# Altium PCB PAY_IFP_V1.PcbDoc (part 4 of 5)
Units mil, origin at the board's own origin, x right, y up, seen from the top; angles counter-clockwise.
Board outline 3661.42 x 3543.31 mil, 6 copper layers (L1 TOP, L2 GND 1, L3 SIGNAL, L4 PWR, L5 GND 2, L6 BOT), stack 59.685 mil thick; 511 components, 371 nets, 2264 pads, 383 vias.
Unrouted connection lines stored in the file: 1001.
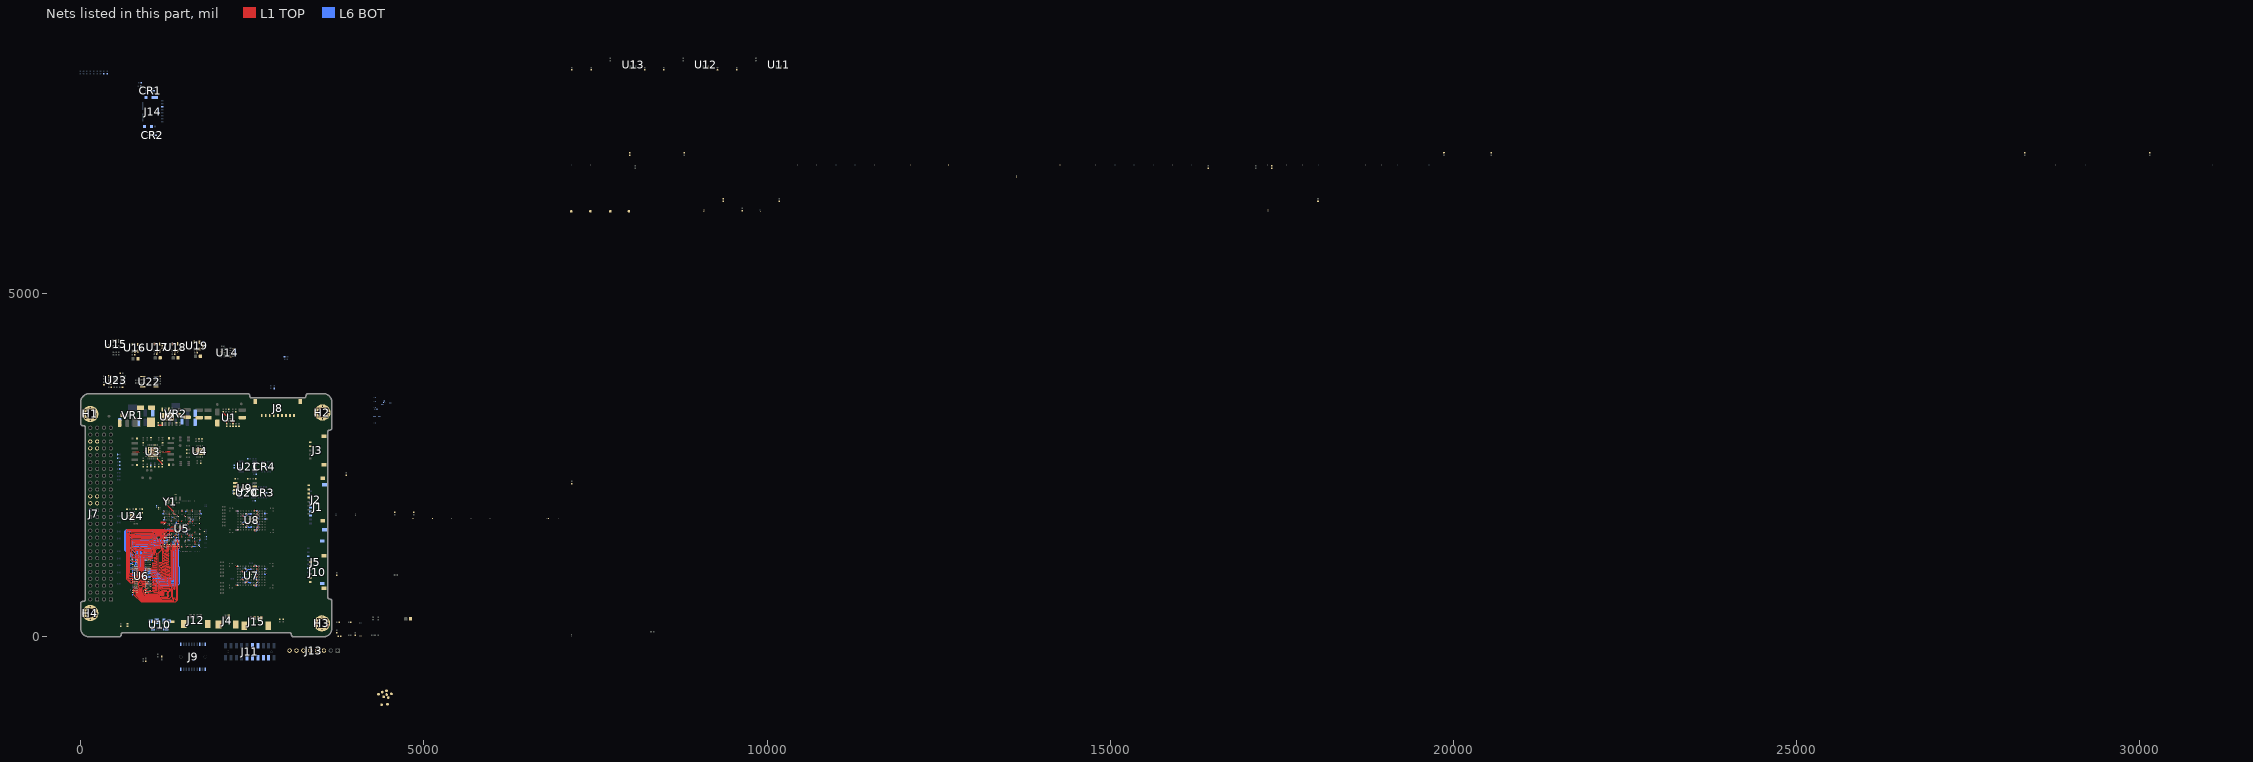
[diagram p3: the nets of this part, all layers, seen from the top]

## Via types
v1: diameter 13.78, hole 5.91, L1 TOP to L6 BOT, 276 vias
v2: diameter 13.78, hole 7.87, L1 TOP to L6 BOT, 71 vias
v3: diameter 15.75, hole 7.87, L1 TOP to L6 BOT, 25 vias
v4: diameter 15.75, hole 7.87, L1 TOP to L6 BOT, tented both sides, 9 vias
v5: diameter 13.78, hole 7.87, L1 TOP to L6 BOT, tented both sides, 2 vias

## Nets (pads, with @x,y where several pads share a name; then routed paths per layer and width w, separated by ;. In a path a pad name is that pad's centre, name@x,y a point inside that pad or via, vN(x,y) a via of type N, cw(c..) or ccw(c..) an arc to the next point about the centre after c; other vN are vias at no path point) (continued)
DDR_A10: U5.T3 U6.L7 | length 1338.9
  L1 TOP w4.92: v1(806.76,976.78) U6.L7@822.5,961.03 ; v1(1258.53,1434.45) U5.T3@1271.32,1447.25
  L6 BOT w4.92: v1(806.76,976.78) 816.6,976.78 832.35,992.52 848.09,992.52 852.03,996.46 852.03,1008.27 848.1,1012.21 842.19,1012.21 838.25,1016.15 838.25,1027.96 842.19,1031.89 852.03,1031.89 855.97,1035.83 855.97,1047.64 852.03,1051.58 842.19,1051.58 838.25,1055.52 838.25,1067.33 842.19,1071.26 848.09,1071.26 852.03,1075.2 852.03,1087.01 848.1,1090.95 842.19,1090.95 838.25,1094.89 838.25,1106.7 842.19,1110.63 852.03,1110.63 855.97,1114.57 855.97,1126.38 852.03,1130.32 842.19,1130.32 838.25,1134.26 838.25,1146.07 842.19,1150 851.05,1150 855.97,1154.92 855.97,1164.77 851.05,1169.69 848.1,1169.69 842.19,1169.69 838.25,1173.63 838.25,1185.44 842.19,1189.37 852.03,1189.37 855.97,1193.31 855.97,1205.12 852.03,1209.06 842.19,1209.06 838.25,1213 838.25,1224.81 842.19,1228.74 848.09,1228.74 852.03,1232.68 852.03,1244.49 848.1,1248.43 836.28,1248.43 820.54,1264.18 820.54,1279.92 816.6,1283.86 800.85,1283.86 796.91,1287.8 796.91,1299.61 800.85,1303.55 848.09,1303.55 852.03,1307.48 852.03,1319.3 848.09,1323.23 765.42,1323.23 756.56,1332.09 756.56,1396.07 762.46,1401.97 1092.19,1401.97 1101.05,1410.83 1110.89,1410.83 1119.75,1401.97 1145.34,1401.97 1180.77,1437.41 1241.8,1437.41 1243.27,1435.93 1257.05,1435.93 v1(1258.53,1434.45)
DDR_A11: U5.M9 U6.R7 | length 1341
  L1 TOP w3.94: v1(1412.07,1536.81) U5.M9@1424.87,1549.61
  L1 TOP w4.92: v1(745.73,1102.76) 806.76,1102.76 U6.R7@822.5,1087.01
  L6 BOT w4.92: v1(745.73,1102.76) 746.22,1103.25 746.22,1123.92 750.65,1128.35 750.65,1176.58 655.18,1272.05 655.18,1527.96 678.8,1551.58 1166.99,1551.58 1170.93,1547.64 1260.5,1547.64 1269.35,1538.78 1339.24,1538.78 1341.21,1536.81 v1(1412.07,1536.81)
DDR_A12: U5.P5 U6.N7 | length 1340.9
  L1 TOP w4.92: v1(806.76,1008.27) U6.N7@822.5,1024.02 ; v1(1309.71,1486.62) 1310.2,1486.62 1322.01,1498.43 U5.P5@1322.5,1498.43
  L6 BOT w4.92: v1(806.76,1008.27) 791.99,1023.04 791.99,1046.66 800.85,1055.52 800.85,1219.89 714.24,1306.5 714.24,1441.34 722.11,1449.22 895.34,1449.22 899.28,1453.15 899.28,1464.96 895.34,1468.9 812.66,1468.9 808.72,1472.84 808.72,1484.65 812.66,1488.59 1159.12,1488.59 1174.87,1472.84 1257.54,1472.84 1271.32,1486.62 v1(1309.71,1486.62)
DDR_A13: U5.V2 U6.T3 | length 1340
  L1 TOP w3.94: v1(1233.92,1384.26) U5.V2@1245.73,1396.07
  L1 TOP w4.92: U6.T3@948.49,1118.51 948.49,1131.3 951.44,1134.26 v1(964.24,1134.26)
  L6 BOT w4.92: v1(964.24,1134.26) 960.3,1130.32 899.28,1130.32 895.34,1134.26 895.34,1146.07 899.28,1150 966.2,1150 970.14,1153.94 970.14,1165.75 966.2,1169.69 899.28,1169.69 895.34,1173.63 895.34,1185.44 899.28,1189.37 1029.2,1189.37 1033.13,1193.31 1033.13,1205.12 1029.2,1209.06 899.28,1209.06 895.34,1213 895.34,1228.74 899.28,1232.68 930.77,1232.68 934.71,1236.62 934.71,1283.86 942.58,1291.74 997.7,1291.74 1001.64,1295.67 1001.64,1307.48 1005.57,1311.42 1092.19,1311.42 1100.06,1319.29 1135.5,1319.29 1139.43,1323.23 1139.43,1331.11 1135.5,1335.04 1093.17,1335.04 1089.24,1331.11 1009.51,1331.11 1005.57,1335.04 1005.57,1346.85 1009.51,1350.79 1147.31,1350.79 1180.77,1384.26 v1(1233.92,1384.26)
DDR_A14: U5.L9 U6.T7 | length 1340.5
  L1 TOP w4.92: v1(735.89,1164.77) 746.72,1153.94 787.07,1153.94 U6.T7@822.5,1118.51 ; v1(1412.07,1562.4) U5.L9@1424.87,1575.2
  L6 BOT w4.92: v1(735.89,1164.77) 639.43,1261.22 639.43,1535.83 670.93,1567.33 1182.74,1567.33 1190.61,1559.45 1261.48,1559.45 1274.28,1572.25 1283.13,1572.25 1295.93,1559.45 1379.59,1559.45 1388.45,1568.31 1406.16,1568.31 v1(1412.07,1562.4)
DDR_A15: U5.R4 U6.M7 | length 1340
  L1 TOP w4.92: U6.M7@822.5,992.52 v1(838.25,976.78) ; v1(1284.12,1460.04) U5.R4@1296.91,1472.84
  L6 BOT w4.92: v1(838.25,976.78) 852.03,976.78 855.97,972.84 855.97,964.96 852.12,961.12 824.07,961.12 823.98,961.03 795.93,961.03 791.01,965.95 791.01,986.62 796.91,992.52 812.66,992.52 824.47,1004.33 824.47,1240.55 743.76,1321.26 743.76,1409.85 751.64,1417.72 1088.25,1417.72 1092.19,1421.66 1092.19,1433.47 1088.25,1437.41 1052.82,1437.41 1049,1441.22 1049,1453.27 1052.82,1457.09 1100.06,1457.09 1107.94,1449.22 1107.94,1433.47 1123.69,1417.72 1143.37,1417.72 1174.87,1449.22 1273.29,1449.22 v1(1284.12,1460.04)
DDR_BA0: U5.V8 U6.M2 | length 1335.1
  L1 TOP w4.92: v1(964.24,976.78) U6.M2@979.98,992.52 ; v1(1386.48,1383.27) U5.V8@1399.28,1396.07
  L6 BOT w4.92: v1(964.24,976.78) 973.09,976.78 988.84,961.03 1048.88,961.03 1115.81,894.1 1115.81,838.98 1123.69,831.11 1226.05,831.11 1229.98,827.17 1229.98,815.36 1226.05,811.42 1151.24,811.42 1148.02,808.2 1148.02,795.67 1151.96,791.74 1371,791.74 1385.5,806.23 1385.5,1273.18 1382,1276.67 1382,1364.03 1386.48,1368.51 v1(1386.48,1383.27)
DDR_BA1: U5.P4 U6.N8 | length 1339.5
  L1 TOP w4.92: v1(775.26,1008.27) U6.N8@791.01,1024.02 ; v1(1263.45,1524.02) 1263.45,1514.18 1266.4,1511.22 1275.26,1511.22 U5.P4@1296.91,1498.43
  L6 BOT w4.92: v1(775.26,1008.27) 710.3,1008.27 701.44,1017.13 701.44,1062.41 710.3,1071.26 748.69,1071.26 761.48,1084.06 761.48,1189.37 670.93,1279.92 670.93,1520.08 686.68,1535.83 1251.64,1535.83 v1(1263.45,1524.02)
DDR_BA2: U5.R8 U6.M3 | length 1341.2
  L1 TOP w4.92: U6.M3@949.47,991.54 v1(965.22,1007.29) ; U5.R8@1399.28,1472.84 v1(1412.07,1460.04)
  L6 BOT w3.94: 1348.09,1379.69 1348.09,1390.16 1355.42,1397.48 1368.15,1397.48 1368.3,1397.64 1384.11,1397.64
  L6 BOT w4.92: v1(965.22,1007.29) 915.02,1007.29 908.13,1000.4 908.13,979.73 915.02,972.84 938.65,972.84 958.33,992.52 1010.5,992.52 1018.37,984.65 1072.5,984.65 1155.18,901.97 1166.99,901.97 1170.93,898.04 1170.93,886.22 1166.99,882.29 1151.24,882.29 1145.34,876.38 1145.34,868.51 1151.24,862.6 1352.03,862.6 1359.91,870.48 1359.91,1252.37 1352.03,1260.24 1352.03,1361.62 1348.09,1365.55 1348.09,1379.69 ; 1384.11,1397.64 1395.34,1408.86 1395.34,1443.31 v1(1412.07,1460.04)
DDR_CAS: U5.T8 U6.K3 | length 1339.2
  L1 TOP w4.92: v1(932.74,945.28) U6.K3@948.49,929.53 ; U5.T8@1399.28,1447.25 v1(1412.07,1434.45)
  L6 BOT w3.94: 1412.07,1287.8 v1(1412.07,1434.45)
  L6 BOT w4.92: v1(932.74,945.28) 924.87,937.41 915.02,937.41 907.15,945.28 907.15,953.15 915.02,961.03 970.14,961.03 985.89,945.28 1041.01,945.28 1100.06,886.22 1100.06,823.23 1147.31,775.99 1375.65,775.99 1412.07,812.41 1412.07,1287.8
DDR_CK_N: TP14.0 U5.T4 U6.K7 | length 1343.3
  L1 TOP w3.94: U6.K7@822.5,929.53 823.86,929.53 841.17,946.85 v1(842.52,946.85) ; v1(1284.12,1434.45) U5.T4@1296.91,1447.25
  L6 BOT w3.94: v1(842.52,946.85) 844.41,944.96 844.41,939.33 847.52,936.22 859.51,936.22 860.3,935.44 865.81,935.44 869.75,939.37 869.75,1308.44 880.6,1319.29 975.09,1319.29 979.03,1323.23 979.03,1335.04 975.09,1338.98 788.08,1338.98 775.26,1351.8 775.26,1369.46 788.08,1382.29 1145.34,1382.29 1171.91,1408.86 1181.95,1408.86 1182.74,1408.07 1221.27,1408.07 1221.47,1408.27 1245.53,1408.27 1247.11,1409.85 1253.41,1409.85 1268.74,1425.17 1274.84,1425.17 v1(1284.12,1434.45)
DDR_CK_P: TP13.0 U5.U4 U6.J7 | length 1341.6
  L1 TOP w3.94: U6.J7@822.5,898.04 823.86,898.04 841.17,915.35 v1(842.52,915.35) ; v1@1283.13,1408.86 v1(1284.12,1408.86) U5.U4@1296.91,1421.66
  L6 BOT w3.94: v1(842.52,915.35) 844.41,917.23 844.41,922.87 847.52,925.98 850.78,925.98 851.56,925.2 872.28,925.2 881.56,934.48 881.56,1303.55 885.5,1307.48 979.98,1307.48 990.84,1318.34 990.84,1339.94 979.98,1350.79 792.98,1350.79 787.07,1356.7 787.07,1364.57 792.98,1370.48 1150.23,1370.48 1176.81,1397.05 1177.06,1397.05 1177.85,1396.26 1226.16,1396.26 1226.36,1396.46 1226.64,1396.46 1228.21,1398.04 1258.3,1398.04 1273.63,1413.36 1276.95,1413.36 1281.45,1408.86 v1(1284.12,1408.86)
DDR_CKE: U5.V3 U6.K9 | length 1341.1
  L1 TOP w3.94: v1(1259.51,1384.26) U5.V3@1271.32,1396.07
  L1 TOP w4.92: U6.K9@759.51,929.53 771.32,929.53 775.26,925.59 v1(775.26,913.78)
  L6 BOT w3.94: 1184.71,1371.46 1230.34,1371.46 1246.72,1371.46 v1(1259.51,1384.26)
  L6 BOT w4.92: v1(775.26,913.78) 773.29,915.75 773.29,946.26 778.21,951.18 788.06,951.18 791.99,947.25 791.99,902.96 801.83,893.11 841.2,893.11 859.91,874.41 869.75,874.41 874.67,879.33 874.67,898.04 878.61,901.97 891.4,901.97 895.34,898.04 895.34,874.41 899.28,870.48 911.09,870.48 915.02,874.41 915.02,916.74 911.09,920.67 899.28,920.67 894.35,925.59 894.35,1109.65 903.21,1118.51 975.06,1118.51 981.95,1125.4 981.95,1165.75 989.83,1173.63 1041.01,1173.63 1048.88,1181.5 1048.88,1216.93 1041.01,1224.81 958.33,1224.81 950.46,1232.68 950.46,1268.11 958.33,1275.99 1005.57,1275.99 1025.26,1295.67 1097.11,1295.67 1106.95,1305.52 1149.28,1305.52 1155.18,1311.42 1155.18,1341.93 1184.71,1371.46
DDR_CS: U5.V7 U6.L2 | length 1339.3
  L1 TOP w4.92: U6.L2@979.98,961.03 v1(995.73,976.78) ; v1(1360.89,1383.27) U5.V7@1373.69,1396.07
  L6 BOT w4.92: v1(995.73,976.78) 1008.53,976.78 1013.45,971.85 1061.68,971.85 1129.59,903.94 1129.59,852.76 1135.5,846.85 1355.97,846.85 1359.91,842.92 1359.91,831.11 1355.97,827.17 1249.67,827.17 1245.73,823.23 1245.73,812.41 1250.65,807.48 1367.78,807.48 1375.65,815.36 1375.65,1269.1 1367.78,1276.97 1367.78,1363.59 1360.89,1370.48 v1(1360.89,1383.27)
DDR_D0: TP11.0 U5.N2 U6.E3 | length 1605.6
  L1 TOP w3.94: 1186.68,1512.21 1233.92,1512.21 U5.N2@1245.73,1524.02
  L1 TOP w4.92: U6.E3@948.49,772.05 883.53,772.05 864.83,790.75 864.83,842.92 855.97,851.78 855.97,890.02 864.83,898.88 864.83,903.55 866.64,905.36 866.64,997.6 855.97,1008.27 855.97,1134.26 804.79,1185.44 789.04,1185.44 769.35,1205.12 744.75,1229.73 744.75,1400.99 753.61,1409.85 867.78,1409.85 871.72,1413.78 871.72,1425.59 867.78,1429.53 749.67,1429.53 745.73,1433.47 745.73,1445.28 749.67,1449.22 1033.13,1449.22 1037.07,1453.15 1037.07,1484.65 1041.01,1488.59 1068.57,1488.59 1092.19,1512.21 1186.68,1512.21
DDR_D1: U5.M7 U6.F7 | length 1599.3
  L1 TOP w3.94: 1180.12,1556.1 1180.19,1556.17 1187.99,1556.17 1190.61,1553.55 1369.75,1553.55 U5.M7@1373.69,1549.61
  L1 TOP w4.92: U6.F7@822.5,803.55 806.76,819.3 718.17,819.3 686.68,850.79 686.68,1508.27 690.61,1512.21 714.24,1512.21 718.17,1516.15 718.17,1527.96 714.24,1531.89 690.61,1531.89 686.68,1535.83 686.68,1547.64 690.61,1551.58 1042.84,1551.58 1047.36,1556.1 1180.12,1556.1
DDR_D2: U5.R3 U6.F2 | length 1594.4
  L1 TOP w3.94: 1189.63,1485.63 1249.67,1485.63
  L1 TOP w4.92: U6.F2@979.98,803.55 964.24,787.8 895.34,787.8 874.67,808.47 874.67,854.73 871.72,857.68 871.72,874.41 874.67,877.37 874.67,899.48 876.48,901.29 876.48,1007.45 871.72,1012.21 871.72,1142.13 800.85,1213 800.85,1236.62 792.98,1244.49 773.29,1244.49 766.47,1251.31 766.47,1391.22 769.35,1394.1 1001.64,1394.1 1005.57,1398.04 1005.57,1409.85 1001.64,1413.78 887.46,1413.78 883.53,1417.72 883.53,1429.53 887.46,1433.47 1037.07,1433.47 1052.82,1449.22 1052.82,1468.9 1056.76,1472.84 1076.44,1472.84 1104,1500.4 1166.99,1500.4 1181.76,1485.63 1189.63,1485.63 ; 1249.67,1485.63 1258.53,1485.63 U5.R3@1271.32,1472.84
DDR_D3: U5.M8 U6.F8 | length 1601.5
  L1 TOP w3.94: 1195.13,1562.9 1195.62,1562.41 1377.59,1562.41 1379.13,1560.87 1388.02,1560.87
  L1 TOP w4.92: U6.F8@791.01,803.55 775.26,787.8 726.05,787.8 670.93,842.92 670.93,1555.52 681.36,1565.94 1191.44,1565.94 1194.49,1562.9 1195.13,1562.9 ; 1388.02,1560.87 U5.M8@1399.28,1549.61
DDR_D4: U5.T2 U6.H3 | length 1601.8
  L1 TOP w4.92: 932.74,1170.67 1033.13,1170.67 1037.07,1166.74 1037.07,1155.91 1033.13,1151.97 932.74,1151.97 928.8,1148.04 928.8,969.89 916.99,958.07 916.99,871.46 921.91,866.54 U6.H3@948.49,866.54 ; 932.74,1171.66 928.8,1175.59 928.8,1185.44 932.74,1189.37 1029.2,1189.37 1032.15,1192.33 1032.15,1205.12 1029.2,1208.07 932.74,1208.07 928.8,1212.01 928.8,1222.84 932.74,1226.78 1029.2,1226.78 1032.15,1229.73 1032.15,1242.52 1029.2,1245.48 938.65,1245.48 934.71,1249.41 934.71,1260.24 938.65,1264.18 1041.01,1264.18 1044.94,1260.24 1044.95,1215.95 1048.88,1212.01 1059.71,1212.01 1064.63,1216.93 1064.63,1293.7 1094.16,1323.23 1139.43,1323.23 1147.31,1331.11 1147.31,1354.73 1182.74,1390.16 1190.61,1390.16 1195.54,1395.08 1195.54,1400.99 1190.61,1405.91 1178.8,1405.91 1171.91,1412.8 1171.91,1427.56 1180.67,1436.32 1207.39,1436.32 1208.77,1434.94 1233.43,1434.94 U5.T2@1245.73,1447.25
DDR_D5: U5.N8 U6.H8 | length 1599.9
  L1 TOP w3.94: 1180.77,1545.67 1359.91,1545.67 1368.76,1536.81 1386.48,1536.81 U5.N8@1399.28,1524.02
  L1 TOP w4.92: U6.H8@791.01,866.54 775.26,850.79 710.3,850.79 702.43,858.67 702.43,1492.52 706.36,1496.46 792.98,1496.46 796.91,1500.4 796.91,1512.21 792.98,1516.15 737.86,1516.15 733.92,1520.08 733.92,1531.89 737.86,1535.83 1041.01,1535.83 1050.85,1545.67 1180.77,1545.67
DDR_D6: U5.T1 U6.G2 | length 1601.6
  L1 TOP w4.92: U6.G2@979.98,835.04 964.24,850.79 911.09,850.79 906.17,855.71 906.17,969.89 914.04,977.76 914.04,1185.44 910.1,1189.37 903.21,1189.37 899.28,1193.31 899.28,1205.12 903.21,1209.06 910.1,1209.06 914.04,1213 914.04,1220.87 907.15,1227.76 907.15,1236.62 911.09,1240.55 918.96,1240.55 922.9,1244.49 922.9,1256.3 918.96,1260.24 875.65,1260.24 871.72,1264.18 871.72,1275.99 875.65,1279.93 1048.88,1279.93 1052.82,1283.86 1052.82,1291.74 1048.88,1295.67 1013.45,1295.67 1009.51,1299.61 1009.51,1311.42 1013.45,1315.36 1064.63,1315.36 1068.57,1319.3 1068.57,1331.11 1064.63,1335.04 1013.45,1335.04 1009.51,1338.98 1009.51,1350.79 1013.45,1354.73 1072.5,1354.73 1088.25,1338.98 1127.62,1338.98 1131.56,1342.92 1131.56,1354.73 1127.62,1358.67 1092.19,1358.67 1076.44,1374.41 1048.88,1374.41 1044.95,1378.35 1044.95,1390.16 1048.88,1394.1 1084.32,1394.1 1100.06,1378.35 1147.31,1378.35 1151.24,1382.29 1151.24,1394.1 1147.31,1398.04 1107.94,1398.04 1092.19,1413.78 1092.19,1426.58 1098.09,1432.48 1122.7,1432.48 1137.46,1417.72 1151.24,1417.72 1159.12,1425.59 1159.12,1438.39 1167.98,1447.25 U5.T1@1220.14,1447.25
DDR_D7: U5.N7 U6.H7 | length 1601.2
  L1 TOP w3.94: 1201.93,1537.31 1202.43,1537.8 1352.03,1537.8 1365.81,1524.02 U5.N7@1373.69,1524.02
  L1 TOP w4.92: U6.H7@822.5,866.54 806.76,882.29 722.11,882.29 718.17,886.22 718.17,901.97 722.11,905.91 742.78,905.91 746.72,909.85 746.72,921.66 742.78,925.59 722.11,925.59 717.68,930.02 717.68,1476.28 722.11,1480.71 879.59,1480.71 883.53,1484.65 883.53,1496.46 879.59,1500.4 812.66,1500.4 808.72,1504.33 808.72,1516.15 812.66,1520.08 1048.88,1520.08 1062.66,1533.86 1198.49,1533.86 1201.93,1537.31
DDR_D8: TP12.0 U5.Y7 U6.D7 | length 1598.2
  L1 TOP w4.92: U6.D7@822.5,740.55 806.76,724.81 806.76,669.69 814.63,661.81 832.35,661.81 841.2,652.96 841.2,617.52 907.15,551.58 1178.8,551.58 1186.68,559.45 1296.91,559.45 1312.66,575.2 1328.41,590.95 1328.41,709.06 1324.47,713 1324.47,732.68 1328.41,736.62 1328.41,768.11 1332.35,772.05 1344.16,772.05 1348.09,768.11 1348.09,716.93 1352.03,713 1363.84,713 1367.78,716.93 1367.78,1245.97 1361.38,1252.37 1361.38,1332.58 U5.Y7@1373.69,1344.89
DDR_D9: U5.AA4 U6.C3 | length 1316.2
  L1 TOP w4.92: U6.C3@948.49,709.06 923.14,734.4 910.1,734.4 900.51,724.81 900.51,644.84 938.65,606.7 1143.37,606.7 1155.18,618.51 1198.49,618.51 1202.43,622.44 1202.43,661.81 1198.49,665.75 1155.18,665.75 1143.37,677.56 1143.37,775.99 1151.24,783.86 1257.54,783.86 1265.42,791.74 1265.42,870.48 1269.35,874.41 1296.91,874.41 1300.85,878.35 1300.85,890.16 1296.91,894.1 1269.35,894.1 1265.42,898.04 1265.42,909.85 1269.35,913.78 1296.91,913.78 1300.85,917.72 1300.85,929.53 1296.91,933.47 1269.35,933.47 1265.42,937.41 1265.42,949.22 1269.35,953.15 1296.91,953.15 1300.85,957.09 1300.85,968.9 1296.91,972.84 1269.35,972.84 1265.42,976.78 1265.42,988.59 1269.35,992.52 1296.91,992.52 1300.85,996.46 1300.85,1008.27 1296.91,1012.21 1269.35,1012.21 1265.42,1016.15 1265.42,1027.96 1269.35,1031.89 1292.98,1031.89 1296.91,1035.83
DDR_D10: U5.Y9 U6.C8 | length 1600.3
  L1 TOP w3.94: 1412.07,1295.67 1412.07,1308.47
  L1 TOP w4.92: U6.C8@791.01,709.06 775.26,693.31 775.26,616.54 879.59,512.21 1383.53,512.21 1412.07,540.75 1412.07,1295.67 ; 1412.07,1308.47 1412.07,1332.09 U5.Y9@1424.87,1344.89
DDR_D11: U5.Y3 U6.C2 | length 1601.4
  L1 TOP w4.92: U6.C2@979.98,709.06 964.51,693.58 931.04,693.58 916.99,679.53 916.99,651.97 950.46,618.51 1131.56,618.51 1147.31,634.26 1186.68,634.26 1190.61,638.19 1190.61,646.07 1186.68,650 1143.37,650 1127.62,665.75 1127.62,787.8 1143.37,803.55 1233.92,803.55 1249.67,819.3 1249.67,1043.7 1253.61,1047.64 1277.23,1047.64 1281.17,1051.58 1281.17,1063.39 1277.23,1067.33 1249.67,1067.33 1245.73,1071.26 1245.73,1083.07 1249.67,1087.01 1277.23,1087.01 1281.17,1090.95 1281.17,1102.76 1277.23,1106.7 1249.67,1106.7 1245.73,1110.63 1245.73,1122.44 1249.67,1126.38 1277.23,1126.38 1281.17,1130.32 1281.17,1142.13 1277.23,1146.07 1249.67,1146.07 1245.73,1150 1245.73,1161.81 1249.67,1165.75 1277.23,1165.75 1281.17,1169.69 1281.17,1181.5 1277.23,1185.44 1249.67,1185.44 1245.73,1189.37 1245.73,1201.18 1249.67,1205.12 1277.23,1205.12 1281.17,1209.06 1281.17,1220.87 1277.23,1224.81 1249.67,1224.81 1245.73,1228.74 1245.73,1239.96 1249.87,1244.1 1276.83,1244.1 1284.12,1251.38 1284.12,1332.09 U5.Y3@1271.32,1344.89
DDR_D12: U5.AA7 U6.A7 | length 1387.3
  L1 TOP w4.92: U6.A7@822.5,646.07 822.5,616.54 899.28,539.77 1190.61,539.77 1194.55,543.7 1332.35,543.7 1344.16,555.52 1344.16,693.31 1348.09,697.25 1359.91,697.25 1363.84,693.31 1367.92,693.31 1377.62,703.01 1377.62,1250.05 1372.05,1255.62 1372.05,1314.18 1372.37,1314.5 1372.37,1317.98 U5.AA7@1373.69,1319.3
DDR_D13: U5.AA3 U6.A2 | length 1601.9
  L1 TOP w4.92: U6.A2@979.98,646.07 995.73,630.32 1123.69,630.32 1127.62,634.26 1127.62,646.07 1123.69,650 1068.57,650 1064.63,653.94 1064.63,665.75 1068.57,669.69 1107.94,669.69 1111.87,673.63 1111.87,795.67 1139.43,823.23 1229.79,823.23 1233.92,827.37 1233.92,839.77 1229.79,843.9 1198.69,843.9 1194.55,848.04 1194.55,860.44 1198.69,864.57 1229.79,864.57 1233.92,868.7 1233.92,881.11 1229.79,885.24 1198.69,885.24 1194.55,889.37 1194.55,901.78 1198.69,905.91 1229.79,905.91 1233.92,910.04 1233.92,922.44 1229.79,926.58 1194.75,926.58 1190.61,930.71 1190.61,943.11 1194.75,947.25 1229.79,947.25 1233.92,951.38 1233.92,963.78 1229.79,967.92 1194.75,967.92 1190.61,972.05 1190.61,984.45 1194.75,988.59 1229.79,988.59 1233.92,992.72 1233.92,1005.12 1229.79,1009.26 1198.69,1009.26 1194.55,1013.39 1194.55,1025.79 1198.69,1029.93 1226.05,1029.93 1230.18,1034.06 1230.18,1046.46 1226.05,1050.59 1198.69,1050.59 1194.55,1054.73 1194.55,1067.13 1198.69,1071.26 1226.24,1071.26 1230.38,1075.4 1230.38,1087.8 1226.24,1091.93 1218.37,1091.93 1214.24,1096.07 1214.24,1108.47 1218.37,1112.6 1226.24,1112.6 1230.38,1116.74 1230.38,1129.14 1226.24,1133.27 1218.37,1133.27 1214.24,1137.41 1214.24,1149.81 1218.37,1153.94 1226.24,1153.94 1230.38,1158.07 1230.38,1170.48 1226.24,1174.61 1218.37,1174.61 1214.24,1178.74 1214.24,1191.15 1218.37,1195.28 1229.79,1195.28 1233.92,1199.41 1233.92,1211.81 1229.79,1215.95 1218.37,1215.95 1214.24,1220.08 1214.24,1252.37 1219.16,1257.29 1266.4,1257.29 1271.32,1262.21 U5.AA3@1271.32,1319.3
DDR_D14: U5.W7 U6.B8 | length 1604.4
  L1 TOP w4.92: U6.B8@791.01,677.56 791.01,665.75 795.93,660.83 800.85,660.83 806.76,654.92 806.76,608.67 887.46,527.96 1355.97,527.96 1359.91,531.89 1359.91,567.33 1363.84,571.26 1375.65,571.26 1379.59,567.33 1379.59,547.64 1383.53,543.7 1395.34,543.7 1399.28,547.64 1399.28,1263.19 1381.89,1280.58 1381.89,1310.1 1385.99,1314.2 1385.99,1349.98 1385,1350.97 1385,1359.16 U5.W7@1373.69,1370.48
DDR_D15: U5.W3 U6.A3 | length 1600.8
  L1 TOP w4.92: U6.A3@948.49,646.07 964.24,661.81 1044.95,661.81 1052.82,669.69 1052.82,681.5 1056.76,685.44 1092.19,685.44 1096.13,689.37 1096.13,701.18 1092.19,705.12 1056.76,705.12 1052.82,709.06 1052.82,720.87 1056.76,724.81 1092.19,724.81 1096.13,728.74 1096.13,740.55 1092.19,744.49 1056.76,744.49 1052.82,748.43 1052.82,760.24 1056.76,764.18 1092.19,764.18 1096.13,768.11 1096.13,779.93 1092.19,783.86 1056.76,783.86 1052.82,787.8 1052.82,799.61 1056.76,803.55 1092.19,803.55 1096.13,807.48 1096.13,819.3 1092.19,823.23 1056.76,823.23 1052.82,827.17 1052.82,838.98 1056.76,842.92 1174.87,842.92 1179.79,847.84 1179.79,862.6 1174.87,867.52 1155.18,867.52 1150.26,872.44 1150.26,887.21 1155.18,892.13 1174.87,892.13 1179.79,897.05 1179.79,911.81 1174.87,916.74 1155.18,916.74 1150.26,921.66 1150.26,936.42 1155.18,941.34 1174.87,941.34 1179.79,946.26 1179.79,961.03 1174.87,965.95 1155.18,965.95 1150.26,970.87 1150.26,985.63 1155.18,990.55 1174.87,990.55 1179.79,995.48 1179.79,1010.24 1174.87,1015.16 1155.18,1015.16 1150.26,1020.08 1150.26,1034.85 1155.18,1039.77 1174.87,1039.77 1179.79,1044.69 1179.79,1059.45 1174.87,1064.37 1155.18,1064.37 1150.26,1069.3 1150.26,1080.12 1155.18,1085.04 1192.58,1085.04 1198.49,1090.95 1198.49,1287.8 1203.41,1292.72 1211.19,1292.72 1214.08,1289.84 1214.08,1278.12 1222.11,1270.08 1253.61,1270.08 1258.53,1275 1258.53,1323.9 1259.02,1324.39 1259.02,1350.39 1258.53,1350.88 1258.53,1357.68 U5.W3@1271.32,1370.48
DDR_DQM0: U5.N1 U6.E7 | length 1603.9
  L1 TOP w4.92: U6.E7@822.5,772.05 838.25,756.3 844.16,756.3 848.09,760.24 848.09,797.64 854,803.55 854,833.07 840.22,846.85 840.22,888.19 854,901.97 854,906.65 856.79,909.44 856.79,987.76 840.22,1004.33 840.22,1126.38 800.85,1165.75 757.54,1165.75 733.92,1189.37 733.92,1461.03 737.86,1464.96 1021.32,1464.96 1025.26,1468.9 1025.26,1480.71 1021.32,1484.65 903.21,1484.65 899.28,1488.59 899.28,1500.4 903.21,1504.33 1056.76,1504.33 1075.13,1522.71 1218.83,1522.71 U5.N1@1220.14,1524.02
DDR_DQM1: U5.Y4 U6.D3 | length 1600.8
  L1 TOP w4.92: U6.D3@948.49,740.55 932.74,756.3 907.15,756.3 899.28,748.43 883.53,748.43 879.59,752.37 863.84,752.37 848.09,736.62 848.09,724.81 855.97,716.93 879.59,716.93 885.5,711.03 885.5,636.22 926.84,594.89 1155.18,594.89 1163.06,602.76 1210.3,602.76 1218.17,610.63 1218.17,657.88 1222.11,661.81 1249.67,661.81 1253.61,665.75 1253.61,677.56 1249.67,681.5 1178.8,681.5 1159.12,701.18 1159.12,756.3 1166.99,764.18 1273.29,764.18 1281.17,772.05 1281.17,850.79 1289.04,858.67 1312.66,858.67 1316.6,862.6 1316.6,1259.26 1308.23,1267.62 1308.23,1299.12 1309.22,1300.1 1309.22,1324.8 1309.71,1325.29 1309.71,1332.09 U5.Y4@1296.91,1344.89
DDR_DQS0_N: TP15.0 U5.R2 U6.G3 | length 1601.4
  L1 TOP w3.94: U6.G3@948.49,835.04 948.49,828.15 945.54,825.2 905.18,825.2 896.32,834.06 896.32,891.2 896.82,891.69 896.82,973.76 899.28,976.22 899.28,1173.63 879.59,1193.31 867.78,1193.31 859.91,1201.18 859.91,1263.11 849.05,1273.96 797.87,1273.96 792.98,1278.85 792.98,1292.69 796.91,1296.63 985.89,1296.63 997.7,1308.44 997.7,1332.06 986.85,1342.92 797.87,1342.92 792.98,1347.81 792.98,1361.65 797.87,1366.54 1018.34,1366.54 1032.15,1380.35 1032.15,1400.03 1038.06,1405.94 1056.76,1405.94 1074.47,1423.65 1074.47,1442.36 1077.4,1445.28 1096.1,1445.28 1124.64,1473.82 1155.18,1473.82 1168.96,1460.04 1239.83,1460.04 1245.73,1465.95 U5.R2@1245.73,1472.84
DDR_DQS0_P: TP16.0 U5.R1 U6.F3 | length 1602
  L1 TOP w3.94: U6.F3@948.49,803.55 938.65,813.39 900.29,813.39 884.51,829.17 884.51,896.09 885.83,897.41 885.83,979.48 887.46,981.11 887.46,1168.73 874.7,1181.5 862.89,1181.5 848.09,1196.29 848.09,1258.21 844.16,1262.15 792.98,1262.15 781.17,1273.96 781.17,1297.58 792.02,1308.44 981,1308.44 985.89,1313.33 985.89,1327.17 981.95,1331.11 792.98,1331.11 781.17,1342.92 781.17,1366.54 792.98,1378.35 1013.45,1378.35 1020.34,1385.24 1020.34,1404.93 1033.16,1417.75 1051.86,1417.75 1062.66,1428.55 1062.66,1447.25 1072.5,1457.09 1091.2,1457.09 1119.75,1485.63 1160.07,1485.63 1173.85,1471.85 1219.16,1471.85 U5.R1@1220.14,1472.84
DDR_DQS1_N: TP17.0 U5.AA6 U6.B7 | length 1594.5
  L1 TOP w3.94: U6.B7@822.5,677.56 832.35,687.41 850.06,687.41 856.95,680.52 856.95,624.44 914.07,567.33 1168,567.33 1175.87,575.2 1269.35,575.2 1283.13,588.98 1283.13,608.64 1271.32,620.45 1271.32,630.35 1281.17,640.19 1281.17,656.92 1286.06,661.81 1301.81,661.81 1312.66,672.67 1312.66,698.2 1301.81,709.06 1190.61,709.06 1185.74,713.93 1185.74,728.28 1190.15,732.68 1300.85,732.68 1312.66,744.49 1312.66,803.55 1308.72,807.48 1308.72,826.21 1313.62,831.11 1337.24,831.11 1348.09,841.96 1348.09,1142.13 1352.03,1146.07 1352.03,1153.94 1348.09,1157.88 1348.09,1181.5 1352.03,1185.44 1352.03,1193.31 1348.09,1197.25 1348.09,1213 1352.03,1216.93 1352.03,1224.81 1348.09,1228.74 U5.AA6@1348.09,1319.3
DDR_DQS1_P: TP18.0 U5.Y6 U6.C7 | length 1595.6
  L1 TOP w3.94: U6.C7@822.5,709.06 832.35,699.22 854.96,699.22 868.76,685.41 868.76,629.33 918.96,579.14 1163.1,579.14 1170.98,587.01 1264.46,587.01 1271.32,593.87 1271.32,603.74 1259.51,615.55 1259.51,635.24 1269.35,645.08 1269.35,661.81 1281.17,673.63 1296.91,673.63 1300.85,677.56 1300.85,693.31 1296.91,697.25 1185.72,697.25 1173.93,709.04 1173.93,733.17 1185.25,744.49 1295.96,744.49 1300.85,749.38 1300.85,798.65 1296.91,802.59 1296.91,831.11 1308.72,842.92 1332.35,842.92 1336.28,846.85 1336.28,1325.2 1348.09,1337.01 U5.Y6@1348.09,1344.89
DDR_ODT: U5.W1 U6.K1 | length 1455.7
  L1 TOP w4.92: U6.K1@1011.48,929.53 1029.2,911.81 1029.2,890.16 1033.13,886.22 1103.02,886.22 1107.94,891.15 1107.94,901.97 1104,905.91 1048.88,905.91 1044.94,909.85 1044.94,921.66 1048.88,925.59 1103.02,925.59 1107.94,930.52 1107.94,941.34 1104,945.28 1033.13,945.28 1029.2,949.22 1029.2,961.03 1033.13,964.96 1104,964.96 1107.94,968.9 1107.94,980.71 1104,984.65 1033.13,984.65 1029.2,988.59 1029.2,1000.4 1033.13,1004.33 1104,1004.33 1107.94,1008.27 1107.94,1020.08 1104,1024.02 1054.02,1024.02 1050.08,1027.96 1050.08,1039.77 1054.02,1043.7 1104,1043.7 1107.94,1047.64 1107.94,1059.45 1104,1063.39 1052.82,1063.39 1048.88,1067.33 1048.88,1079.14 1052.82,1083.07 1104,1083.07 1107.94,1087.01 1107.94,1098.82 1104,1102.76 1076.44,1102.76 1072.5,1106.7 1072.5,1118.51 1076.44,1122.44 1104,1122.44 1107.94,1126.38 1107.94,1138.19 1104,1142.13 1076.44,1142.13 1072.5,1146.07 1072.5,1157.88 1076.44,1161.81 1096.13,1161.81 1104,1161.81 1107.94,1165.75 1107.94,1177.56 1100.06,1185.44 1100.06,1193.31 1105.97,1199.22 1105.97,1211.03 1091.2,1225.79 1091.2,1269.1 1112.86,1290.75 1157.15,1290.75 1163.06,1296.66 1163.06,1306.5 1190.67,1334.12 1192.09,1345.47 1192.09,1351.28 1199.47,1358.66 1208.33,1358.66 U5.W1@1220.14,1370.48
DDR_RAS: U5.U8 U6.J3 | length 1349.5
  L1 TOP w4.92: v1(932.74,913.78) U6.J3@948.49,898.04 ; U5.U8@1399.28,1421.66 1412.07,1408.86 1412.07,1402.06 1411.58,1401.57 1411.58,1378.84 1439.35,1351.07 v2(1439.35,1273.24)
  L6 BOT w4.92: v1(932.74,913.78) 932.74,893.11 942.58,883.27 1049.87,883.27 1068.57,864.57 1068.57,768.11 1092.19,744.49 1407.15,744.49 1440.94,778.29 1440.94,1023.77 1433.07,1031.65 1433.07,1265.93 1439.35,1272.22 v2(1439.35,1273.24)
DDR_RESET: R162.1 U5.V1 U6.T2 | length 443.2
  L1 TOP w4.92: U6.T2@979.98,1118.51 999.67,1138.19 1041.01,1138.19 1048.39,1145.57 1048.39,1185.44 1048.39,1194.79 1051.83,1198.23 1069.55,1198.23 1076.44,1205.12 1076.44,1283.86 1100.06,1307.48 1143.37,1307.48 1160.1,1324.22 1160.1,1346.56 1187.96,1374.41 1198.49,1374.41 U5.V1@1220.14,1396.07
DDR_VREF: C100.1 C120.1 C122.2 C123.1 C124.1 R164.1 R165.2 U5.Y1 U6.H1 U6.M8 | length 1093.2
  L1 TOP w11.81: 1180.77,1298.51 1202.43,1316.34 1202.43,1325.24 1208.29,1331.1 1208.29,1340.17 1209.04,1340.92 1216.18,1340.92 U5.Y1@1220.14,1344.89
  L1 TOP w13.78: v1(775.26,976.78) U6.M8@791.01,992.52
  L1 TOP w15.75: U6.H1@1011.48,866.54 v1(1035.1,866.54) 1119.75,866.54 1127.62,874.41 1127.62,1107.68 1127.62,1130.32 1127.62,1152.96 1127.62,1175.59 1127.62,1217.92 1180.77,1271.07 1180.77,1298.51
  L6 BOT w11.81: v1(775.26,976.78) 756.56,976.78 756.56,898.04 782.15,872.44 825.46,872.44 847.11,850.79 952.43,850.79 970.14,868.51 1009.51,868.51 1011.48,866.54 v1(1035.1,866.54) ; v1(1208.66,1340.55) 1209.04,1340.92 1209.04,1354.34 C100.1@1210.9,1356.2
  L6 BOT w15.75: v1(1035.1,866.54) 1050.85,860.14
DDR_WE: U5.N10 U6.L3 | length 1347.6
  L1 TOP w4.92: U6.L3@948.49,961.03 v1(964.24,945.28) ; v1(1437.66,1511.22) U5.N10@1450.46,1524.02
  L6 BOT w3.94: 1424.87,1498.43 1424.87,1427.76 1423.88,1426.78 1423.88,1331.11 1437.66,1317.33 1437.66,1291.74
  L6 BOT w4.92: v1(964.24,945.28) 979.98,929.53 1023.29,929.53 1084.31,868.51 1084.31,819.3 1143.37,760.24 1379.59,760.24 1422.74,803.39 1422.74,1276.81 1437.66,1291.74 ; 1424.87,1498.43 v1(1437.66,1511.22)
EXP_USB_N: J2.8 U5.G1 | length 51.7
  L1 TOP w4.92: 1169.01,1676.09 1213.81,1676.09 1213.97,1676.24 1218.82,1676.24 U5.G1@1220.14,1677.56
EXP_USB_P: J2.7 U5.G2 | length 84.1
  L1 TOP w4.92: 1166.77,1665.26 1225.24,1665.26 1233.43,1665.26 U5.G2@1245.73,1677.56
FLEXCOM0_UART_RX: R86.2 U22.1
FLEXCOM0_UART_TX: R84.2 U22.4
FLEXCOM1_I2C_SCL: R28.2 R77.2 R118.2
FLEXCOM1_I2C_SDA: R30.2 R69.2 R119.2
FLEXCOM2_SPI_CLK: R156.2 U19.5
FLEXCOM2_SPI_MISO: R158.2 U18.5
FLEXCOM3_UART_RX: R96.2 U23.1
FLEXCOM3_UART_TX: R98.2 U23.4
FLEXCOM4_I2C_SCL: J9.05 R89.2 R109.2
FLEXCOM4_I2C_SDA: J9.06 R90.2 R104.2
FLEXCOM5_I2C_SCL: J10.5 J10.6 R112.2 R132.2
FLEXCOM5_I2C_SDA: J10.1 J10.2 R110.2 R130.2
FLEXCOM6_UART_RX: J11.14 R25.1 R106.2
FLEXCOM7_UART_RX: J11.11 R121.2
FLEXCOM7_UART_TX: J11.12 R120.2
FLEXCOM8_SPI_CK: R65.2 U17.5
FLEXCOM8_SPI_MOSI: R107.2 U16.5
FLEXCOM9_UART_RX_DEBUG: J15.3 R117.2 R195.2
FLEXCOM9_UART_TX_DEBUG: J15.2 R115.2 R194.2
FLEXCOM10_I2C_SCL: R74.2 R152.2 R153.1 R154.1 R155.1
FLEXCOM10_I2C_SDA: R72.2 R144.2 R149.1 R150.1 R151.1
FLT#: R2.1 U1.4 | length 79.3
  L1 TOP w7.87: R2.1@2083,3273.38 2083.78,3273.38 2084.96,3272.2 2084.96,3256.47 2122.64,3218.8 U1.4@2130.51,3218.8
GND: BT1.1 C1.1 C2.1 C3.1 C4.1 C5.1 C6.1 C7.1 C9.1 C10.1 C11.1 C12.1 C13.2 C14.1 C15.1 C16.1 C17.1 C18.1 C19.1 C20.1 C21.2 C22.1 C23.1 C24.2 C25.1 C26.1 C27.1 C28.1 C29.1 C30.2 C31.1 C32.2 C33.1 C34.1 C35.1 C36.1 C37.1 C38.1 C39.1 C40.1 C41.1 C42.1 C43.1 C44.1 C45.1 C46.1 C47.1 C48.2 C49.1 C50.1 C51.1 C52.1 C53.1 C54.1 C55.1 C56.1 C57.1 C58.1 C59.1 C60.1 C61.1 C62.1 C63.1 C64.1 C65.1 C66.1 C67.1 C68.1 C69.1 C70.1 C71.1 C72.1 C73.1 C74.1 C75.1 C76.1 C77.1 C78.1 C79.2 C80.2 C81.2 C82.2 C83.2 C84.2 C85.2 C86.2 C87.2 C88.2 C89.2 C90.2 C91.2 C92.2 C93.2 C94.2 C95.2 C96.2 C97.2 C98.2 C99.2 C100.2 C101.2 C102.2 C103.2 C104.1 C105.1 C106.1 C107.1 C108.1 C109.1 C110.1 C111.1 C112.1 C113.1 C114.1 C115.1 C116.1 C117.1 C118.1 C119.1 C121.1 C122.1 C123.2 C124.2 C125.1 C126.1 C127.1 C128.1 C129.1 C130.1 C131.1 C132.1 C133.1 C134.1 C135.1 C136.1 C137.1 C138.1 C139.1 C140.1 C141.1 C142.1 C143.1 C144.1 C145.1 C146.1 C147.1 C148.1 C149.1 C150.1 C151.1 C152.1 C153.1 C154.1 C155.1 C156.1 C157.1 C158.1 C159.1 C160.1 C161.1 C162.1 C163.1 C164.1 C165.1 C166.1 C167.1 C168.1 C169.1 C170.1 C171.1 C172.1 C173.1 C174.1 C175.1 C176.1 C177.1 C178.1 C179.1 C180.1 C181.1 C182.1 C183.1 C184.1 CR1.2 CR2.2 CR3.3 CR4.3 D1.1 D2.2 D3.2 D4.1 D5.1 D6.1 H1.1 H2.1 H3.1 H4.1 J1.4 J1.5 J1.6 J1.M1 J1.M2 J2.M1 J2.M2 J3.4 J3.5 J3.6 J4.2 J4.M1 J4.M2 J5.3 J5.6 J5.M1 J5.M2 J7.29 J7.30 J7.31 J7.32 J7.47 J7.48 J8.5 J8.M1 J8.M2 J9.01 J9.02 J9.19 J9.20 J10.3 J10.7 J11.10 J11.13 J11.16 J11.18 J12.M1 J12.M2 J13.3 J14.G1 J14.G2 J14.G3 J14.G4 J14.P6 J15.4 J15.M1 J15.M2 R6.2 R7.2 R8.2 R11.2 R43.2 R45.1 R52.2 R54.1 R55.1 R56.1 R57.1 R58.1 R59.2 R159.2 R163.2 R165.1 R166.1 R193.1 R205.2 R206.2 R216.2 R222.2 R224.1 R225.1 R231.2 R234.1 R236.1 R237.1 TP19.0 TP20.0 TP21.0 TP22.0 U1.8 U2.6 U2.9 U3.3 U3.12 U3.13 U3.28 U3.29 U3.33 U4.3 U4.17 U5.A1 U5.A11 U5.A14 U5.A17 U5.A21 U5.AA1 U5.AA8 U5.AA9 U5.AA11 U5.AA14 U5.AA17 U5.AA21 U5.B6 U5.C4 U5.C7 U5.D9 U5.D13 U5.E1 U5.E7 U5.E15 U5.E21 U5.F16 U5.G5 U5.G9 U5.G11 U5.G15 U5.G17 U5.H1 U5.H8 U5.H9 U5.H14 U5.H21 U5.J4 U5.J18 U5.K11 U5.L1 U5.L7 U5.L11 U5.L15 U5.L21 U5.N4 U5.N18 U5.P1 U5.P8 U5.P14 U5.P21 U5.R5 U5.R7 U5.R11 U5.R15 U5.R17 U5.T5 U5.T17 U5.U1 U5.U7 U5.U15 U5.U21 U5.V9 U5.V13 U5.W5 U6.A9 U6.B1 U6.B3 U6.B9 U6.D1 U6.D8 U6.E1 U6.E2 U6.E8 U6.F9 U6.G1 U6.G8 U6.G9 U6.J2 U6.J8 U6.M1 U6.M9 U6.P1 U6.P9 U6.T1 U6.T9 U7.G2@2562.98,1028.11 U7.G3@2562.98,988.74 U7.G4@2562.98,949.37 U7.G5@2562.98,910 U7.G6@2562.98,870.63 U7.G7@2562.98,831.26 U7.G8@2562.98,791.89 U7.G9@2562.98,752.52 U7.H2@2523.61,1028.11 U7.H9@2523.61,752.52 U7.J5@2484.24,910 U7.L3@2405.5,988.74 U7.L8@2405.5,791.89 U7.M4@2366.13,949.37 U7.M7@2366.13,831.26 U7.P2@2287.39,1028.11 U7.P9@2287.39,752.52 U8.G2@2568.23,1834.57 U8.G3@2568.23,1795.2 U8.G4@2568.23,1755.83 U8.G5@2568.23,1716.46 U8.G6@2568.23,1677.09 U8.G7@2568.23,1637.72 U8.G8@2568.23,1598.35 U8.G9@2568.23,1558.98 U8.H2@2528.86,1834.57 U8.H9@2528.86,1558.98 U8.J5@2489.49,1716.46 U8.L3@2410.75,1795.2 U8.L8@2410.75,1598.35 U8.M4@2371.38,1755.83 U8.M7@2371.38,1637.72 U8.P2@2292.64,1834.57 U8.P9@2292.64,1558.98 U9.4 U10.5 U10.6 U10.7 U10.8 U10.9 U10.10 U10.11 U11.3 U12.3 U13.3 U14.6 U15.2 U16.2 U17.2 U18.2 U19.2 U20.2 U21.2 U22.5 U23.6 U24.1 U24.17 VR1.1 VR2.1 Y1.2 Y1.4 | length 6054.8
  L1 TOP w3.94: v1(1412.07,1689.87) 1412.32,1689.87 1424.62,1677.56 U5.G9@1424.87,1677.56
  L1 TOP w4.92: v3(762.08,2696.89) v3(794.56,2696.89) v3(856.57,2696.89) ; v3(1187.34,2698) 1187.84,2697.5 1207.52,2697.5 1208.85,2698.82 1217.47,2698.82 1220.34,2698.82 1264.26,2698.82 1303,2698.82 1306.98,2702.8 1264.26,2702.8 ; v3(1217.47,2696.9) 1217.47,2702.8 1220.34,2699.93 v3(1220.34,2697)
  L1 TOP w5.91: v2(2348.2,966.48) 2348.61,966.48 2365.72,949.37 U7.M4@2366.13,949.37 ; v2@2349.15,848.24 U7.M7@2366.13,831.26 ; v2@2354.07,1654.59 U8.M7@2371.05,1637.61 ; v2@2354.07,1772.7 U8.M4@2371.05,1755.72 ; U7.L8@2405.5,791.89 2405.55,791.89 v2(2425.2,811.48) v2(2425.2,811.48) ; U7.L3@2406.69,988.6 2406.69,987.77 2424.98,969.48 v2(2425.2,969.48) ; U8.L8@2410.42,1598.24 v2@2427.4,1615.22 ; U8.L3@2411.61,1794.95 v2@2428.59,1777.97 ; U7.H9@2523.61,752.52 v2@2540.59,735.54 ; U7.H2@2523.61,1028.11 v2@2540.59,1045.09 ; U8.H9@2528.53,1558.87 v2@2545.51,1541.88 ; U8.H2@2528.53,1834.46 v2@2545.51,1851.44 ; v2@2546,769.5 U7.G9@2562.98,752.52 ; v2@2546,887.61 U7.G6@2562.98,870.63 ; v2@2546,966.35 U7.G4@2562.98,949.37 ; v2@2550.92,1575.85 U8.G9@2567.9,1558.87 ; v2@2550.92,1693.96 U8.G6@2567.9,1676.98 ; v2@2550.92,1772.7 U8.G4@2567.9,1755.72 ; U7.G2@2562.82,1025.64 v2@2579.81,1008.66 ; U7.G8@2562.98,791.89 v2@2579.96,774.91 ; U7.G7@2562.98,831.26 v2@2579.96,814.28 ; U7.G5@2562.98,910 v2@2579.96,893.02 ; U7.G3@2562.98,988.74 v2@2579.96,971.76 ; U8.G2@2567.75,1831.99 v2@2584.73,1815.01 ; U8.G8@2567.9,1598.24 v2@2584.88,1581.25 ; U8.G7@2567.9,1637.61 v2@2584.88,1620.62 ; U8.G5@2567.9,1716.35 v2@2584.88,1699.36 ; U8.G3@2567.9,1795.09 v2@2584.88,1778.1
  L1 TOP w7.87: v1(731.95,1118.51) U6.T9@759.51,1118.51
  L1 TOP w9.84: v2@2259.21,752.87 2287.03,752.87 U7.P9@2287.39,752.52 ; v2@2259.21,1028.46 U7.P2@2287.03,1028.46 ; v2@2264.13,1559.22 2291.95,1559.22 U8.P9@2292.31,1558.87 ; v2@2264.13,1834.81 U8.P2@2291.95,1834.81
  L1 TOP w11.81: U6.J8@791.01,898.04 v1(806.76,913.78) ; v1(1188.65,1422.05) 1189.02,1421.67 1203.25,1421.67 U5.U1@1220.14,1421.66 ; v1(1194.55,1498.43) U5.P1@1220.14,1498.43 ; v1(1201.44,1650.99) 1201.82,1651.36 1219.53,1651.36 U5.H1@1220.14,1651.97 ; v1(1205.38,1576.18) 1205.75,1575.81 1219.53,1575.81 U5.L1@1220.14,1575.2 ; v1(1205.38,1728.74) U5.E1@1220.14,1728.74 ; v1(1207.35,1818.31) U5.A1@1220.14,1831.11 ; U5.AA1@1220.14,1319.3 v1(1232.94,1306.5) ; v1(1276.24,1626.38) U5.J4@1296.91,1626.38 ; v1(1282.15,1524.02) U5.N4@1296.91,1524.02 ; v1(1284.12,1792.72) U5.C4@1296.91,1779.93 ; v1(1309.71,1459.06) 1310.09,1459.44 1310.09,1460.42 U5.R5@1322.5,1472.84 ; v1(1309.71,1689.37) 1310.24,1689.37 1322.05,1677.56 U5.G5@1322.5,1677.56 ; U5.W5@1322.5,1370.48 1317.58,1365.55 1317.58,1346.33 1322.84,1341.08 v1(1322.84,1340.55) ; U5.T5@1322.5,1447.25 v1(1335.3,1460.04) ; U5.B6@1348.09,1805.52 v1@1360.89,1792.72 ; v1(1358.92,1576.18) 1359.3,1575.81 1373.08,1575.81 U5.L7@1373.69,1575.2 ; v1(1360.17,1792) 1360.71,1792 1367.86,1784.85 1368.76,1784.85 U5.C7@1373.69,1779.93 ; v1(1360.89,1741.54) U5.E7@1373.69,1728.74 ; v1(1362.44,1411.26) 1362.97,1411.26 1373.37,1421.66 U5.U7@1373.69,1421.66 ; U5.R7@1373.69,1472.84 v1(1386.48,1485.63) ; v1(1396.27,1293.7) 1396.65,1294.08 1396.65,1306.07 1398.18,1307.6 ; 1399.28,1308.7 U5.AA8@1399.28,1319.3 ; U5.P8@1399.28,1498.43 v1(1412.07,1485.63) ; U5.H8@1399.28,1651.97 v1(1412.07,1664.77) ; v1(1424.37,1769.1) 1424.75,1768.72 1424.75,1754.45 U5.D9@1424.87,1754.33 ; v1(1424.87,1304.53) U5.AA9@1424.87,1319.3 ; U5.V9@1424.87,1396.07 v1(1437.66,1383.27) ; U5.H9@1424.87,1651.97 v1(1437.66,1664.77) ; v1(1463.25,1588) U5.K11@1476.05,1600.79 ; v1(1476.05,1304.53) U5.AA11@1476.05,1319.3 ; v1(1476.05,1452.17) U5.R11@1476.05,1472.84 ; U5.L11@1476.05,1575.2 v1(1488.84,1588) ; U5.G11@1476.05,1677.56 v1(1476.05,1692.33) ; U5.A11@1476.05,1831.11 1477.86,1832.92 1477.86,1846.87 v1(1478.24,1847.24) ; v1(1523.62,1383.85) 1524,1384.23 1524,1392.84 U5.V13@1527.23,1396.07 ; U5.D13@1527.23,1754.33 v1(1527.23,1769.1) ; v1(1540.02,1511.22) U5.P14@1552.82,1498.43 ; v1(1552.82,1304.53) U5.AA14@1552.82,1319.3 ; U5.H14@1552.82,1651.97 v1(1565.61,1639.18) ; U5.A14@1552.82,1831.11 v1(1552.82,1845.87) ; v1(1565.61,1408.86) U5.U15@1578.41,1421.66 ; v1(1565.61,1741.54) U5.E15@1578.41,1728.74 ; U5.R15@1578.41,1472.84 v1(1591.2,1485.63) ; U5.L15@1578.41,1575.2 v1(1593.17,1575.2) ; U5.G15@1578.41,1677.56 v1(1591.2,1690.36) ; U5.F16@1604,1703.15 v1(1616.8,1715.95) ; v1(1616.8,1485.63) U5.R17@1629.59,1472.84 ; v1(1625.99,1305.11) 1626.36,1305.49 1626.36,1316.07 U5.AA17@1629.59,1319.3 ; U5.T17@1629.59,1447.25 v1(1642.39,1434.45) ; U5.G17@1629.59,1677.56 v1(1642.39,1690.36) ; U5.A17@1629.59,1831.11 v1(1629.59,1850.79) ; U5.N18@1655.18,1524.02 1656.37,1525.21 1664.98,1525.21 v1(1665.36,1525.59) ; U5.J18@1655.18,1626.38 1657.17,1624.39 1668.92,1624.39 v1(1669.29,1624.01) ; v1(1731.95,1304.53) U5.AA21@1731.95,1319.3 ; U5.U21@1731.95,1421.66 1733.14,1422.85 1739.78,1422.85 v1(1740.16,1423.22) ; U5.P21@1731.95,1498.43 1732.56,1497.82 1746.34,1497.82 v1(1746.72,1497.44) ; U5.L21@1731.95,1575.2 v1(1746.72,1575.2) ; U5.H21@1731.95,1651.97 1746.56,1651.97 v1(1746.72,1652.12) ; U5.E21@1731.95,1728.74 v1(1746.72,1728.74) ; U5.A21@1731.95,1831.11 v1(1744.75,1818.31)
  L1 TOP w13.78: v1(735.89,992.52) U6.M9@759.51,992.52 ; v1(735.89,1055.52) U6.P9@759.51,1055.52 ; v1(742.78,677.56) U6.B9@759.51,677.56 ; v1(742.78,803.55) U6.F9@759.51,803.55 ; v1(742.78,835.04) U6.G9@759.51,835.04 ; v1(759.51,629.33) U6.A9@759.51,646.07 ; v1(775.26,724.81) U6.D8@791.01,740.55 ; U6.E8@791.01,772.05 v1(806.76,787.8) ; U6.G8@791.01,835.04 v1(806.76,850.79) ; v1(932.74,661.81) U6.B3@948.49,677.56 ; v1(964.24,913.78) U6.J2@979.98,898.04 ; U6.E2@979.98,772.05 v1(995.73,787.8) ; v1(995.73,1008.27) U6.M1@1011.48,992.52 ; U6.B1@1011.48,677.56 v1(1035.1,677.56) ; U6.D1@1011.48,740.55 v1(1035.1,740.56) ; U6.E1@1011.48,772.05 v1(1035.1,772.05) ; U6.G1@1011.48,835.04 v1(1035.1,835.04) ; U6.P1@1011.48,1055.52 v1(1035.1,1055.52) ; U6.T1@1011.48,1118.51 v1(1035.1,1118.51)
  L6 BOT w9.84: v2(2258.2,1028.48) C134.1@2286.2,1028.48 ; v2(2259.2,752.48) 2259.84,753.12 2282.84,753.12 C133.1@2283.2,753.48 ; v2(2263.12,1558.83) 2263.87,1559.58 2288.87,1559.58 C145.1@2289.12,1559.83 ; v2(2265.12,1834.83) 2265.48,1835.18 2286.76,1835.18 C144.1@2287.12,1834.83 ; v2(2348.2,966.48) 2364.79,949.89 2405.61,949.89 v2(2425.2,969.48) ; v2(2348.45,848.24) 2372.23,872.02 2403.66,872.02 2425.2,850.47 v2(2425.2,811.48) ; v2(2353.37,1654.59) 2377.15,1678.36 2408.58,1678.36 2427.4,1659.54 v2(2427.4,1615.92) ; v2(2353.37,1772.7) 2369.83,1756.24 2407.56,1756.24 v2(2429.29,1777.97) ; C131.1@2398.92,1001.48 2398.92,1000.76 2404.78,994.89 2405.5,994.89 2424.45,975.95 2424.45,970.23 v2(2425.2,969.48) ; C132.1@2401.33,792.52 2401.33,794.6 2417.45,810.72 2424.45,810.72 v2(2425.2,811.48) ; C146.1@2406.25,1598.87 2406.25,1599.58 2412.11,1605.45 2416.94,1605.45 v2(2427.4,1615.92) ; C139.1@2406.25,1793.87 2406.25,1793.15 2420.67,1778.72 2428.54,1778.72 v2(2429.29,1777.97) ; C130.1@2480.89,792.52 2443.82,792.52 2425.2,811.14 v2(2425.2,811.48) ; C129.1@2480.89,987.52 2443.24,987.52 v2(2425.2,969.48) ; C140.1@2485.81,1598.87 2444.45,1598.87 v2(2427.4,1615.92) ; C141.1@2485.81,1793.87 2445.19,1793.87 v2(2429.29,1777.97) ; v2(2540.59,1045.79) 2541.34,1045.03 2549.09,1045.03 2555.06,1039.06 2555.62,1039.06 2567.08,1027.59 2567.08,1026.16 2567.35,1025.89 2568.79,1025.89 2579.75,1014.93 2579.75,1009.42 v2(2580.5,1008.66) ; v2(2541.29,735.54) 2542.35,735.54 2546.71,739.89 2555.62,739.89 C125.1@2560.89,745.17 ; v2@2544.99,888.36 2547.12,888.36 2551.77,893.02 v2(2580.66,893.02) 2580.66,917.3 2568.07,929.89 2567.35,929.89 2561.48,935.76 C128.1@2561.48,936.48 ; v2(2545.3,887.61) 2545.3,857.66 2554.9,848.06 2555.62,848.06 2558.01,845.67 2558.01,844.23 2567.35,834.89 2568.07,834.89 2579.91,823.06 2579.91,815.03 v2(2580.66,814.28) v2(2580.66,774.91) 2551.77,774.91 2546.37,769.5 v2(2545.3,769.5) 2555.88,758.92 2555.88,752.08 C125.1@2561.48,746.48 ; v2@2545.51,1852.08 2546.63,1852.08 2553.26,1845.45 2559.95,1845.45 2565.81,1839.58 C137.1@2565.81,1838.87 ; v2(2546.21,1541.88) 2546.96,1542.64 2556.22,1542.64 2561.82,1548.24 2562.54,1548.24 2568.4,1554.11 C138.1@2568.4,1554.83 ; v2(2550.22,1575.85) 2550.97,1575.09 2550.97,1569.96 C138.1@2562.63,1558.3 ; v2(2550.22,1693.96) 2550.22,1666.01 2557.82,1658.41 2558.54,1658.41 C143.1@2564.4,1652.54 ; v2(2550.22,1772.7) 2550.97,1771.94 2550.97,1759.96 2565.81,1745.12 2565.81,1741.7 2585.58,1721.93 v2(2585.58,1699.36) 2557.66,1699.36 2553.01,1694.71 2552.04,1694.71 v2@2551.12,1693.79 ; 2556.69,1581.25 v2(2585.58,1581.25) v2(2585.58,1620.62) ; 2556.69,1778.1 v2(2585.58,1778.1) ; C128.1@2560.89,938.77 2546.05,953.61 2546.05,965.6 v2(2545.3,966.35) 2546.37,966.35 2551.77,971.76 v2(2580.66,971.76) ; C137.1@2564.18,1836.25 v2(2585.43,1815.01) ; C143.1@2564.4,1651.83 2564.4,1651.11 2570.27,1645.24 2570.99,1645.24 2585.12,1631.11 v2@2585.12,1621.83 ; C135.1@2681.33,912.52 v2@2709.51,912.52 ; C136.1@2683.17,992.54 v2@2711.35,992.54 ; C148.1@2686.25,1718.87 v2@2714.43,1718.87 ; C147.1@2688.09,1798.88 v2@2716.27,1798.88
  L6 BOT w11.81: 716.2,1113.09 v1(731.95,1118.51) ; 720.14,1050.1 v1(735.89,1055.52) ; C85.2@759.51,731.2 759.59,731.17 v1(775.26,724.81) ; C86.2@802.33,819.3 802.5,820.52 v1(806.76,850.79) ; v1(806.76,913.78) 817.48,917.72 C88.2@821.52,919.2 ; C119.1@1174.51,1317.2 1176.4,1319.09 1176.4,1342.67 1177.15,1343.42 1177.15,1344.58 1188.78,1356.2 C100.2@1190.23,1356.2 ; v1(1188.65,1422.05) 1189.02,1421.67 C113.1@1203.88,1421.67 ; v1(1194.55,1498.43) C109.1@1209.81,1498.43 ; C43.1@1200.46,1792.72 1200.65,1793.43 v1(1207.35,1818.31) C44.1@1209.81,1834.06 ; v1(1201.44,1650.99) 1201.82,1651.36 1216.09,1651.36 C47.1@1216.7,1651.97 ; v1(1205.38,1576.18) 1205.75,1575.81 1217.4,1575.81 C68.1@1218.01,1575.2 ; C71.1@1212.66,1706.89 v1(1205.38,1728.74) 1219.7,1736.56 C77.1@1221.62,1737.6 ; v1(1232.94,1306.5) 1249.67,1308.96 1249.67,1307.87 1249.67,1287.8 ; v1(1276.24,1626.38) C74.1@1291.5,1626.38 ; v1(1282.15,1524.02) C104.1@1297.41,1524.02 ; C114.1@1309.71,1444.79 v1(1309.71,1459.06) ; v1(1309.71,1689.37) 1310.09,1689.75 1324.36,1689.75 C45.1@1324.96,1690.36 ; v1(1322.84,1340.55) 1323.21,1340.17 C118.1@1323.21,1325.55 ; C115.1@1333.33,1444.79 1333.42,1445.51 v1(1335.3,1460.04) C111.1@1350.56,1460.04 ; 1341.7,1575.2 1342.3,1575.81 1358.54,1575.81 v1(1358.92,1576.18) ; C73.1@1345.63,1741.54 v1(1360.89,1741.54) ; v1(1362.44,1411.26) v1(1362.44,1411.26) C110.1@1376.64,1411.32 ; C105.1@1378.11,1501.38 1378.14,1501.33 v1(1386.48,1485.63) ; C69.1@1383.53,1641.15 1386.78,1647.05 1399.77,1670.67 1399.82,1670.65 v1(1412.07,1664.77) 1413.06,1663.78 C49.1@1413.06,1649.51 ; v1(1396.27,1293.7) 1396.27,1294.24 1398.67,1296.63 1398.67,1319.18 C116.1@1399.28,1319.79 ; C78.1@1405.2,1764.67 1424.27,1768.99 v1(1424.37,1769.1) ; v1@1424.4,1768.99 v1(1424.37,1769.1) ; C65.1@1424.87,1753.84 1424.87,1768.4 v1(1424.37,1769.1) ; v1(1437.66,1383.27) C112.1@1437.66,1398.53 ; C106.1@1463.25,1572.74 v1(1463.25,1588) ; v1(1476.05,1304.53) C76.1@1476.05,1319.79 ; C107.1@1488.84,1572.74 v1(1488.84,1588) ; v1(1523.62,1383.85) 1524,1384.23 1524,1393.64 C60.1@1527.23,1396.87 ; C66.1@1527.23,1754.54 v1(1527.23,1769.1) ; 1527.23,1828.65 1535.25,1828.65 1552.47,1845.87 v1(1552.82,1845.87) ; C108.1@1537.56,1495.48 v1(1540.02,1511.22) C52.1@1555.77,1513.68 ; v1(1552.82,1304.53) C72.1@1552.82,1319.79 ; C50.1@1563.08,1626.31 1563.6,1626.31 v1(1565.61,1639.18) ; 1565.61,1425.1 v1(1565.61,1408.86) C55.1@1581.85,1408.86 ; v1(1565.61,1741.54) C39.1@1580.87,1741.54 ; 1575.95,1562.41 v1(1593.17,1575.2) ; C54.1@1591.2,1470.38 v1(1591.2,1485.63) ; v1(1591.2,1690.36) C42.1@1593.67,1674.61 ; C46.1@1601.54,1715.95 v1(1616.8,1715.95) ; C75.1@1616.8,1470.38 v1(1616.8,1485.63) ; v1(1625.99,1305.11) 1626.36,1305.49 1626.36,1315.64 C64.1@1629.59,1318.87 ; C62.1@1629.59,1835.54 v1(1629.59,1850.79) ; C64.1@1630.23,1318.87 C64.1@1629.59,1318.87 ; v1(1642.39,1434.45) C56.1@1658.13,1431.99 ; v1(1642.39,1690.36) C40.1@1642.39,1705.61 ; C51.1@1653.56,1625.2 1654.38,1624.39 1668.92,1624.39 v1(1669.29,1624.01) ; C53.1@1655.56,1524.2 1656.57,1525.21 1664.98,1525.21 v1(1665.36,1525.59) ; 1667.98,1321.76 1666.01,1319.79 1629.59,1319.79 C64.1@1629.59,1318.87 ; C59.1@1721.13,1333.07 1721.46,1332.19 v1(1731.95,1304.53) ; C58.1@1731.46,1400 1739.47,1408.01 v1@1739.47,1421.66 ; C67.1@1731.46,1498.43 1732.07,1497.82 1746.34,1497.82 v1(1746.72,1497.44) ; C61.1@1731.46,1575.2 v1(1746.72,1575.2) ; C63.1@1731.46,1651.97 1746.56,1651.97 v1(1746.72,1652.12) ; C41.1@1731.46,1728.74 1731.56,1728.74 v1(1746.72,1728.74) ; C57.1@1731.56,1421.2 1731.56,1421.55 1731.46,1421.66 v1@1739.47,1421.66 ; v1(1740.16,1423.22) 1739.47,1422.54 v1@1739.47,1421.66 ; C38.1@1742.29,1834.06 1742.3,1834 v1(1744.75,1818.31) 1752.04,1794.61 C37.1@1752.62,1792.72
  L6 BOT w13.78: 727.03,682.98 v1(742.78,677.56) ; 727.03,798.13 v1(742.78,803.55) ; 727.03,840.46 v1(742.78,835.04) ; 735.89,976.78 v1(735.89,992.52) ; 757.54,605.71 v1(759.51,629.33) 764.93,645.08 ; v1(932.74,661.81) 953.9,677.56 ; C83.2@963.25,774.02 963.81,774.26 v1(995.73,787.8) ; v1(964.24,913.78) 969.63,898.1 C87.2@969.65,898.04 ; C84.2@995.73,766.64 v1(995.73,787.8) ; 995.73,808.96 v1(995.73,787.8) ; 1019.35,735.14 v1(1035.1,740.56) ; 1019.35,777.46 v1(1035.1,772.05) ; v1(1035.1,677.56) C93.2@1050.85,672.15 ; v1(1035.1,835.04) 1050.85,839.47 ; v1(1035.1,1055.52) 1050.01,1050.39 1050.85,1050.1 ; v1(1035.1,1118.51) 1050.85,1113.09
  other v1: 1176.78,1343.05
  other v2: 2709.89,912.14 2711.73,992.16 2714.81,1718.49 2716.65,1798.51 2545.51,1852.14
  other v3: 918.06,2696.89 1217.47,2696.9
  other v4: 1004.89,2649.33 1052.13,2649.33 1099.37,2649.33 1004.89,2696.57 1052.13,2696.56 1099.37,2696.57 1004.89,2743.82 1052.13,2743.82 1099.37,2743.82
GOM_VBAT: J7.45 J7.46
HHSRTUNE: R52.1 U5.K7 | length 100.5
  L1 TOP w3.94: v1(1303.15,1576.18) 1327.76,1600.79 U5.K7@1373.69,1600.79
  L6 BOT w3.94: v1(1303.15,1576.18) 1304.13,1575.2 1322.5,1575.2
HPM_MCP16502: R34.1 R102.2 R157.2 R159.1
I2C_SCL_EXP_PC104: J2.6 R29.1
I2C_SDA_EXP_PC104: J2.5 R27.1
IF_MCU_SHUTDOWN: J1.7 R5.2
JTAG_NTRST_PC22: J13.6 R136.2
JTAG_TCK_PC23: J13.5 R137.2
JTAG_TDI_PC25: J13.4 R139.2
JTAG_TDO_PC26: J13.7 R140.2
JTAG_TMS_PC24: J13.8 R138.2
LPM: R33.1 TP4.0 U5.A6 | length 117.8
  L1 TOP w4.92: 1264.77,1914.43 U5.A6@1348.09,1831.11
LVDS_RXC_N: J8.9 R210.2 U19.4
LVDS_RXC_P: J8.8 R210.1 U19.3
LVDS_RXD_N: J8.4 R209.2 U18.4
LVDS_RXD_P: J8.3 R209.1 U18.3
LVDS_TxC_N: J8.7 R208.2 U17.3
LVDS_TxC_P: J8.6 R208.1 U17.4
LVDS_TxD_N: J8.2 R207.2 U16.3
LVDS_TxD_P: J8.1 R207.1 U16.4
MIPI_REXT: R59.1 U5.V18 | length 59.8
  L1 TOP w3.94: U5.V18@1655.18,1396.07 1667.98,1383.27 1667.98,1357.72 v1(1666.99,1356.74)
  L6 BOT w3.94: v1(1666.99,1356.74) 1667.98,1355.75 1667.98,1342.43
MRAM_QSPI_CLK: R87.2 U9.6
MRAM_QSPI_CS: R85.2 R192.2 U9.1
MRAM_QSPI_D0: R83.2 U9.5
MRAM_QSPI_D1: R81.2 U9.2
MRAM_QSPI_D2: R79.2 U9.3
MRAM_QSPI_D3: R76.2 U9.7
NetBT1_2: BT1.2 C179.2 R223.1
NetC6_2: C6.2 U1.10 | length 67.6
  L1 TOP w7.87: U1.10@2192.52,3153.84 2192.52,3150.68 2194.49,3148.71 2205.62,3148.71 2220.47,3133.86 C6.2@2220.47,3104.33
NetC7_2: C7.2 U1.7 | length 52.5
  L1 TOP w7.87: C7.2@2130.51,3104.33 2130.51,3140.37 2135.12,3144.98 2135.43,3144.98 2137.4,3146.95 U1.7@2137.4,3153.84
NetC8_1: C8.1 D3.1 L1.1 U2.8
NetC8_2: C8.2 U2.1 | length 53.6
  L1 TOP w19.68: C8.2@1132.31,3080.76 1183.75,3080.76 U2.1@1185.31,3079.19
NetC22_2: C22.2 U3.24 | length 111.6
  L1 TOP w7.87: U3.24@1121.03,2598.15 1121.03,2590.27 1184.37,2526.93 1184.37,2522.51 1191.15,2515.74 C22.2@1191.33,2515.74